# Altium PCB PTx-V2.PcbDoc (part 1 of 2)
Units mil, origin at the board's own origin, x right, y up, seen from the top; angles counter-clockwise.
Board outline 6102.36 x 4488.19 mil, 2 copper layers (Top Layer, Bottom Layer); 123 components, 103 nets, 431 pads, 228 vias.
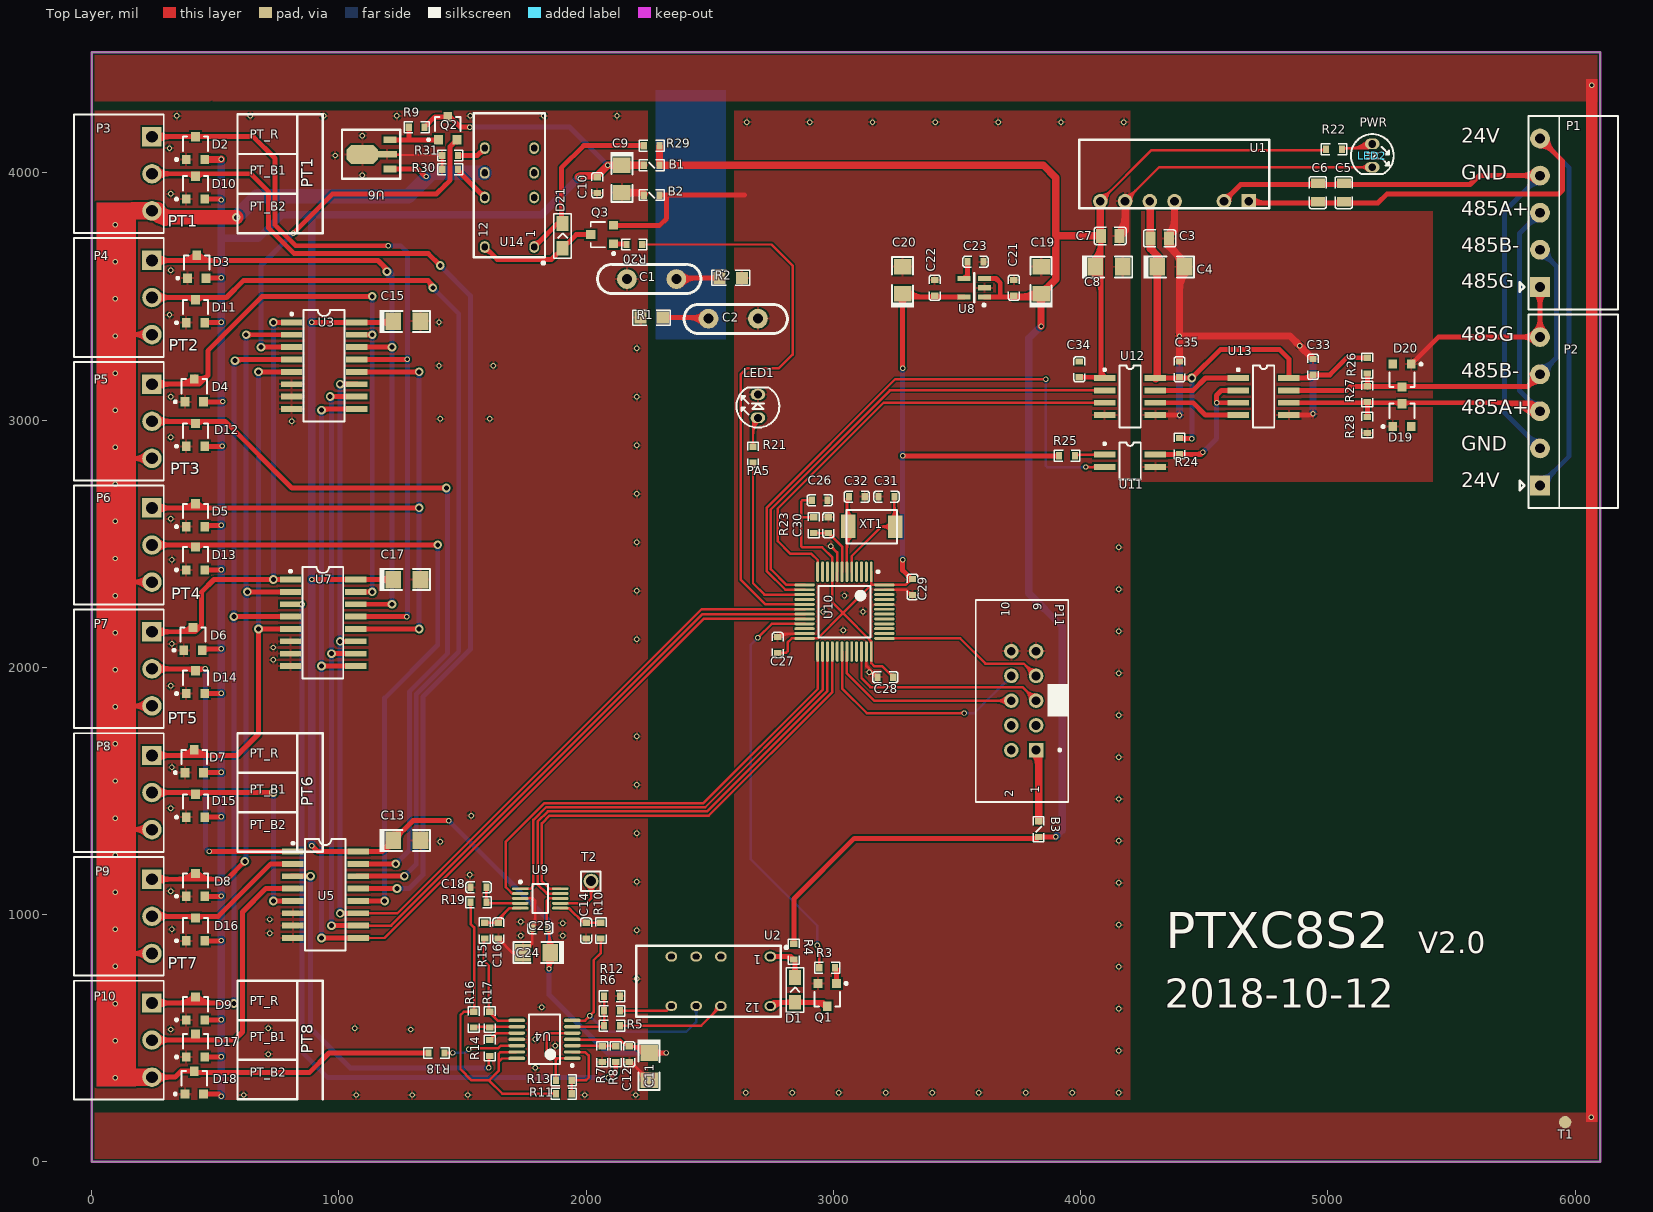
[diagram p0: Top Layer view]
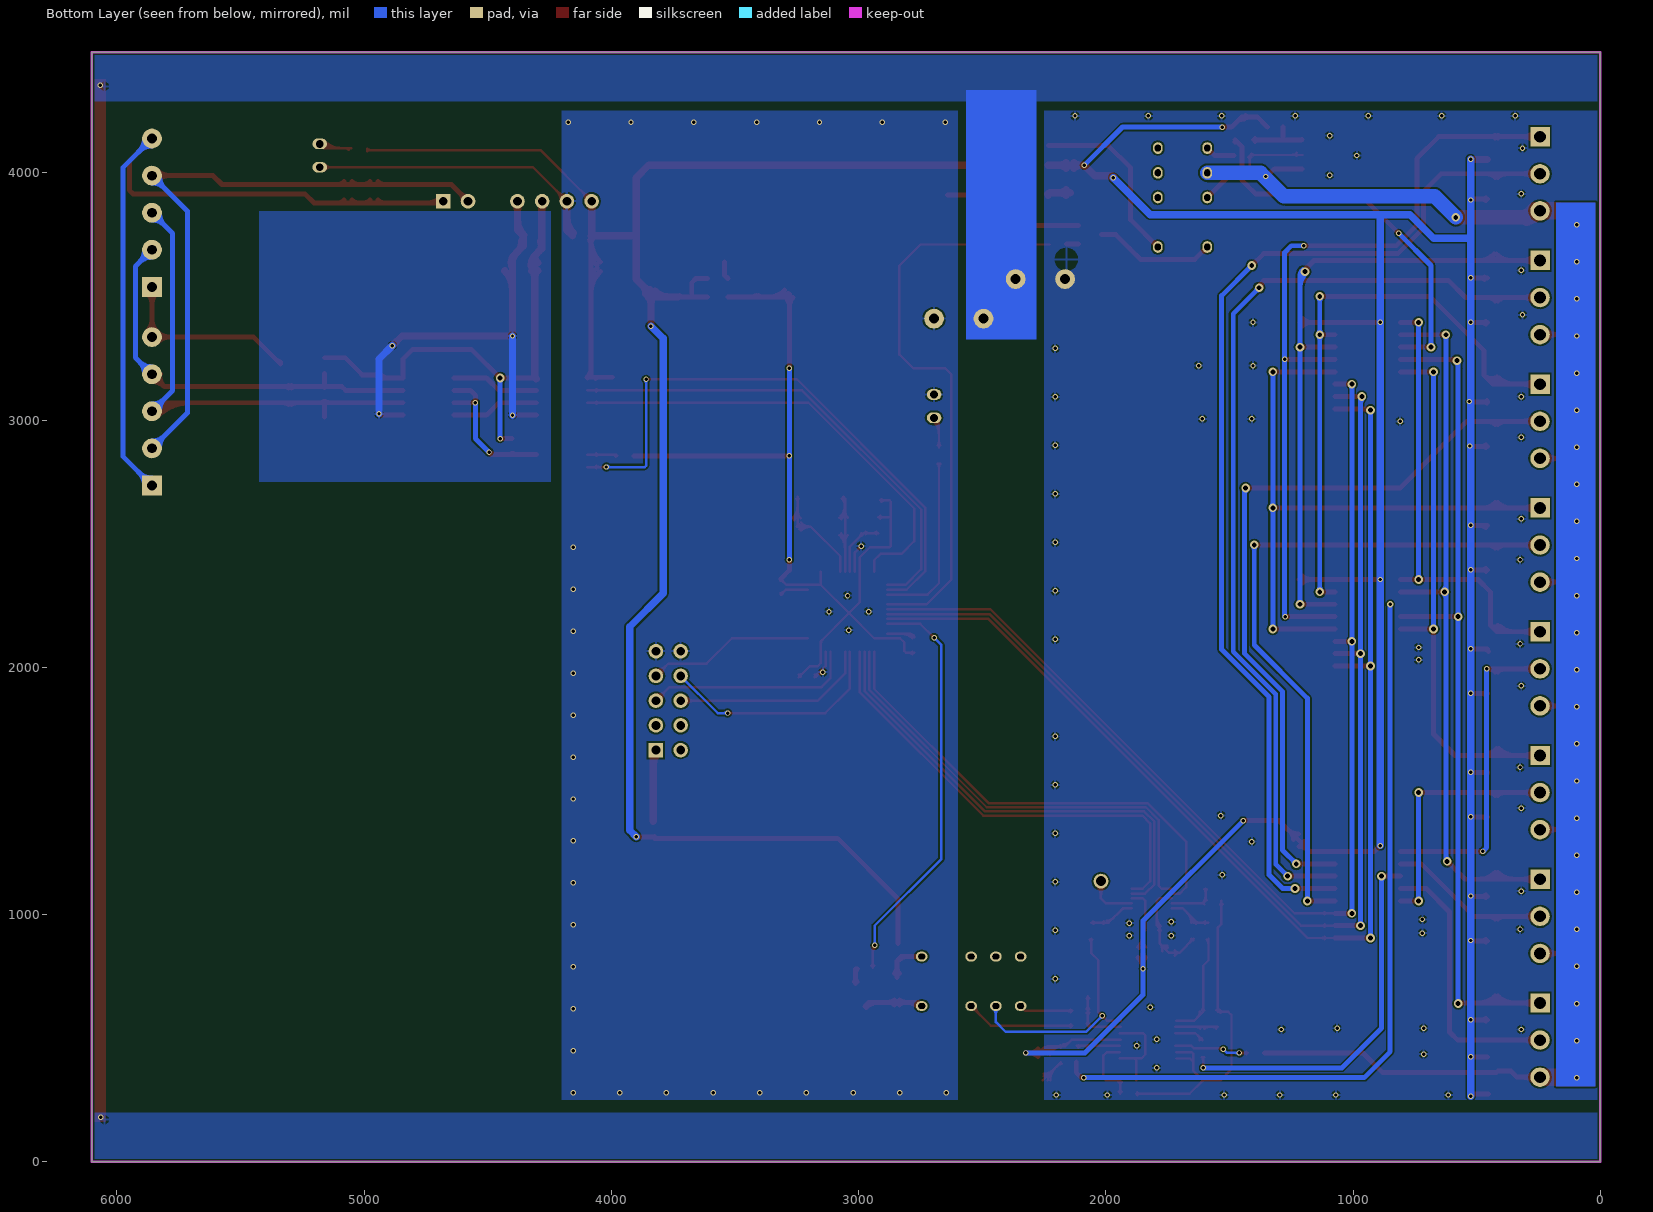
[diagram p1: Bottom Layer view, seen from below]

## Layer stack, top to bottom
Top Layer: signal copper 1.4
Dielectric: dielectric 12.6, FR-4, Dk 4.8
Bottom Layer: signal copper 1.4

## Board outline
0,0 6102.36,0 6102.36,4488.19 0,4488.19

## Design rules (kind name [scope] priority, off if disabled: settings)
Clearance [All] p1: gap=7
ComponentClearance [All] p1: gap=0 collisioncheckmode=3 verticalgap=0 showdistances=FALSE
HoleSize [All] p1: absolutevalues=TRUE maxlimit=1000 minlimit=1 maxpercent=80.000 minpercent=20.000
HoleToHoleClearance [All] p1: gap=7 allowstackedmicrovias=TRUE
MinimumSolderMaskSliver [All] p1: minsoldermaskwidth=0
PolygonConnect [All] p1: connectstyle=Relief reliefconductorwidth=10 reliefentries=4 polygonreliefangle="90 Angle"
RoomDefinition 前端 [InComponentClass('前端')] p1: confinementstyle=ConfineIn formatcopy=TRUE lockcomponents=FALSE outline -3165,-1025 -1165,-1025 -1165,-25 -3165,-25
RoomDefinition mcu [InComponentClass('mcu')] p2: confinementstyle=ConfineIn formatcopy=TRUE lockcomponents=FALSE outline -3165,-1025 -1165,-1025 -1165,-25 -3165,-25
RoutingVias [All] p1: holewidth=14 width=22 viastyle="Through Hole" minholewidth=14 minwidth=22 maxholewidth=280 maxwidth=500
SilkToSilkClearance [All] p1: silktosilkclearance=0
SilkscreenOverComponentPads [All] p1: minsilkscreentomaskgap=0
SolderMaskExpansion [All] p1: expansion=4
TestPointUsage [All] p1: valid=0 allowmultiple=FALSE
Testpoint [All] p1: side=15 testpointundercomponent=TRUE minsize=40 maxsize=100 preferedsize=60 minholesize=0 maxholesize=40 preferedholesize=32 testpointgrid=1 style=1023 order=0123456789
Width [All] p1: maxlimit=100 minlimit=7 preferedwidth=7
18 further rules are at their usual default settings.

## Classes and differential pairs
component class mcu: B3 C5 C7 C12 C19 C20 C22 C24 C25 C26 C27 C28 C30 C31 C32 C33 C34 C35 D19 D20 LED1 LED2 P11 R13 R14 R16 R18 R23 R25 R26 R28 T2 U8 U9 U10 U11 U12 U13 XT1
component class 前端: B1 B2 C1 C2 C3 C4 C5 C6 C7 C8 C9 C10 C11 C12 C13 C14 C15 C16 C17 C18 D1 D2 D3 D4 D5 D6 D7 D8 D9 D10 D11 D12 D13 D14 D15 D16 D17 D18 D21 P1 P2 P3 P4 P5 P6 P7 P8 P9 P10 Q1 Q2 Q3 R1 R2 R3 R4 R5 R6 R7 R8 R9 R10 R11 R12 R13 R14 R15 R16 R17 R18 R19 R20 R29 R30 R31 T1 U1 U2 U3 U4 U5 U6 U7 U14

## Components (designator, comment, footprint, x,y, rotation, side; value= is the part's Value field where it differs from the comment)
B1 "磁珠" 0603L 2265,4030 r180 top
B2 "磁珠" 0603L 2265,3910 r180 top
B3 "磁珠" 0603L 3830,1345 r270 top
C1 "0.1uF/1KV" RAD0.2 2265,3570 r180 top
C2 "0.1uF/1KV" RAD0.2 2595,3410 r0 top
C3 "4.7uF/16V" 0805C 4320,3735 r180 top
C4 "10uF/16V" 3216C 4310,3620 r180 top
C5 "2.2uF/50V" 0805C 5065,3920 r90 top
C6 "2.2uF/50V" 0805C 4960,3920 r90 top
C7 "4.7uF/16V" 0805C 4120,3745 r180 top
C8 "10uF/16V" 3216C 4060,3620 r180 top
C9 "10uF/16V" 3216C 2145,4030 r90 top
C10 "0.1uF" 0603C 2045,3950 r270 top
C11 "10uF/16V" 3216C 2255,440 r90 top
C12 "0.1uF" 0603C 2175,435 r90 top
C13 "10uF/16V" 3216C 1220,1300 r180 top
C14 "1uF" 0603C 2000,935 r270 top
C15 "10uF/16V" 3216C 1220,3400 r180 top
C16 "10nF" 0603C 1645,935 r270 top
C17 "10uF/16V" 3216C 1220,2355 r180 top
C18 "10nF" 0603C 1565,1110 r180 top
C19 "10uF/16V" 3216C 3840,3510 r270 top
C20 "10uF/16V" 3216C 3280,3510 r270 top
C21 "0.1uF" 0603C 3730,3535 r270 top
C22 "0.1uF" 0603C 3410,3535 r270 top
C23 "470P" 0603C 3575,3640 r0 top
C24 "10uF/16V" 3216C 1855,845 r0 top
C25 "0.1uF" 0603C 1815,945 r0 top
C26 "0.1uF" 0603C 2945,2675 r180 top
C27 "0.1uF" 0603C 2775,2090 r270 top
C28 "0.1uF" 0603C 3210,1960 r180 top
C29 "0.1uF" 0603C 3320,2325 r90 top
C30 "0.1uF" 0603C 2980,2575 r90 top
C31 "22P" 0603C 3215,2690 r180 top
C32 "22P" 0603C 3095,2690 r0 top
C33 "0.1uF" 0603C 4940,3215 r270 top
C34 "0.1uF" 0603C 3995,3205 r90 top
C35 "0.1uF" 0603C 4400,3205 r270 top
D1 "SS14" SOD123 2845,695 r90 top
D2 "PESD5V0L2BT" SOT23A 420,4100 r0 top
D3 "PESD5V0L2BT" SOT23A 425,3620 r0 top
D4 "PESD5V0L2BT" SOT23A 415,3120 r0 top
D5 "PESD5V0L2BT" SOT23A 420,2615 r0 top
D6 "PESD5V0L2BT" SOT23A 410,2115 r0 top
D7 "PESD5V0L2BT" SOT23A 415,1620 r0 top
D8 "PESD5V0L2BT" SOT23A 420,1120 r0 top
D9 "PESD5V0L2BT" SOT23A 420,620 r0 top
D10 "PESD5V0L2BT" SOT23A 420,3940 r0 top
D11 "PESD5V0L2BT" SOT23A 420,3440 r0 top
D12 "PESD5V0L2BT" SOT23A 420,2940 r0 top
D13 "PESD5V0L2BT" SOT23A 420,2440 r0 top
D14 "PESD5V0L2BT" SOT23A 420,1940 r0 top
D15 "PESD5V0L2BT" SOT23A 420,1440 r0 top
D16 "PESD5V0L2BT" SOT23A 420,940 r0 top
D17 "PESD5V0L2BT" SOT23A 420,470 r0 top
D18 "PESD5V0L2BT" SOT23A 415,320 r0 top
D19 "PESD5V0L2BT" SOT23A 5300,3020 r0 top
D20 "PESD5V0L2BT" SOT23A 5300,3180 r180 top
D21 "SS14" SOD123 1905,3745 r90 top
LED1 "LED" LED-3 2695,3055.76 r90 top
LED2 "LED" LED-3 5180,4070 r270 top
P1 "Header 5" KF2DEG-3.81-5 5858.27,3838.58 r90 top locked
P2 "Header 5" KF2DEG-3.81-5 5858.27,3035.43 r90 top locked
P3 "Header 3" KF2DEG-3.81-3 244.09,3996.06 r270 top locked
P4 "Header 3" KF2DEG-3.81-3 244.09,3495.5 r270 top locked
P5 "Header 3" KF2DEG-3.81-3 244.09,2994.94 r270 top locked
P6 "Header 3" KF2DEG-3.81-3 244.09,2494.38 r270 top locked
P7 "Header 3" KF2DEG-3.81-3 244.09,1993.81 r270 top locked
P8 "Header 3" KF2DEG-3.81-3 244.09,1493.25 r270 top locked
P9 "Header 3" KF2DEG-3.81-3 244.09,992.69 r270 top locked
P10 "Header 3" KF2DEG-3.81-3 244.09,492.13 r270 top locked
P11 "Header 5X2" DC2.54-10 3770,1865 r90 top
Q1 "S9014" SOT23A 2975,675 r180 top
Q2 "S9014" SOT23A 1440,4180 r0 top
Q3 "S9014" SOT23A 2065,3750 r90 top
R1 "1M" 0805R 2265,3415 r180 top
R2 "1M" 0805R 2585,3575 r0 top
R3 "10K" 0603R 2975,785 r0 top
R4 "50R" 0603R 2840,850 r90 top
R5 "30K" 0603R 2105,550 r0 top
R6 "1K" 0603R 2105,610 r0 top
R7 "10K" 0603R 2065,435 r90 top
R8 "10K" 0603R 2120,435 r270 top
R9 "1K" 0603R 1315,4185 r0 top
R10 "10K" 0603R 2060,935 r90 top
R11 "10K" 0603R 1910,275 r180 top
R12 "1K" 0603R 2105,670 r0 top
R13 "10K" 0603R 1910,330 r0 top
R14 "1K" 0603R 1610,460 r270 top
R15 "10K" 0603R 1590,935 r90 top
R16 "1K" 0603R 1545,575 r90 top
R17 "47K" 0603R 1610,575 r90 top
R18 "10K" 0603R 1395,440 r180 top
R19 "10K" 0603R 1565,1050 r0 top
R20 "10K" 0603R 2195,3710 r180 top
R21 "1K" 0603R 2675,2860 r90 top
R22 "10K" 0603R 5025,4095 r0 top
R23 "10K" 0603R 2920,2575 r270 top
R24 "1K" 0603R 4400,2895 r90 top
R25 "100R" 0603R 3945,2855 r180 top
R26 "10K" 0603R 5160,3220 r90 top
R27 "120R" 0603R 5160,3105 r90 top
R28 "10K" 0603R 5160,2980 r90 top
R29 "50R" 0603R 2265,4110 r0 top
R30 "2.5K" 0603R 1450,4015 r0 top
R31 "2.7K" 0603R 1450,4070 r0 top
T1 "TP" TP1 5960,160 r0 top
T2 "TP" TESTP 2020,1135 r0 top
U1 "D240505S" D240505S-2W 4680,3885 r180 top
U2 "JDQ(G6S-2)" JDQ-G6S-2 2495,730 r180 top
U3 "CD4051" SOP16 940,3220 r270 top
U4 "OPA4330AIPWR" TSSOP14-65 1832,495 r180 top locked
U5 "CD4051" SOP16 945,1080 r270 top
U6 "TL431B" SOT-89 1155,4075 r90 top
U7 "CD4051" SOP16 935,2180 r270 top
U8 "MIC5219-3.3" SOT23-5 3570,3535 r180 top
U9 "ADS1118" TSSOP10 1815,1065 r0 top
U10 "STM32F103C8T6" LQFP48 3045,2225 r270 top
U11 "TLP281" SOP4 4200,2835 r270 top
U12 "ADUM3201" SOP8 4200,3095 r270 top
U13 "BL3085B" SOP8 4740,3095 r270 top
U14 "JDQ(G6S-2)" JDQ-G6S-2 1690,3950 r90 top
XT1 "8M" 5032 3155,2570 r180 top

## Footprints (in the part's own frame and the unit in brackets; to place one, negate y for a bottom-side part, rotate by r counter-clockwise, add the part's x,y. Pads: shape width x height; smd on the part's side, far side on the other; paste and mask are expansions set on the pad)
0603C [mil]
  rect 25x30 smd: 1(-32,0) 2(32,0)
  silkscreen extent -51,-22 51,22
0603L [mil]
  rect 25x30 smd: 1(-32,0) 2(32,0)
  silkscreen extent -51,-22 51,22
0603R [mil]
  rect 25x30 smd: 1(-32,0) 2(32,0)
  silkscreen extent -51,-22 51,22
0805C [mm]
  rect 1x1.45 smd: 1(-0.95,0) 2(0.95,0)
  silkscreen extent -1.64,-0.86 1.64,0.89
0805R [mm]
  rect 1.25x1.25 smd: 1(-1.143,0) 2(1.143,0)
  silkscreen extent -1.93,-0.76 1.93,0.79
3216C [mm] "A型"
  rect 1.6x1.8 smd: 1(0,0) 2(-2.8,0)
  silkscreen extent -3.78,-1.17 1.4,1.19
5032 [mm]
  rect 1.5x2.3 smd: 1(-2.438,0.025)
  rect 1.5x2.4 smd: 2(2.388,0)
  silkscreen extent -2.59,-1.7 2.59,1.75
D240505S-2W [mm] "24V转5Vdcdc模块"
  rect 1.5x1.5 hole 0.9: 1(0,0)
  round 1.5 hole 0.9: 2(2.54,0) 4(7.62,0) 5(10.16,0) 6(12.7,0) 7(15.24,0)
  silkscreen extent -2.09,-6.3 17.41,0.7
DC2.54-10 [mm] "Connector; IDC, PCB Transition - 2 Rows, Thru-Hole; 10 Position; Vertical; Pitch 2.54 mm; Body 18.00 x 6.1 x 7.45 mm (LxWxH)"
  rect 1.5x1.5 hole 0.9: 1(-5.08,-1.27)
  round 1.5 hole 0.9: 2(-5.08,1.27) 3(-2.54,-1.27) 4(-2.54,1.27) 5(0,-1.27) 6(0,1.27) 7(2.54,-1.27) 8(2.54,1.27) 9(5.08,-1.27) 10(5.08,1.27)
  silkscreen extent -10.39,-4.57 10.36,4.93
JDQ-G6S-2 [mm] "继电器（G6S-2） 5VDC"
  oval 1.2x1 hole 0.6 slot 0.7 at 0 deg: 1(-6.35,-2.54) 3(-1.27,-2.54) 4(1.27,-2.54) 5(3.81,-2.54) 8(3.81,2.54) 9(1.27,2.54) 10(-1.27,2.54) 12(-6.35,2.54)
  silkscreen extent -8.14,-3.65 7.4,3.65
KF2DEG-3.81-3 [mm]
  rect 2x2 hole 1.2: 1(-3.81,0)
  round 2 hole 1.2: 2(0,0) 3(3.81,0)
  silkscreen extent -6.1,-8 6.1,1.2
KF2DEG-3.81-5 [mil]
  rect 80x80 hole 39.37: 1(-300,0)
  round 80 hole 39.37: 2(-150,0) 3(0,0) 4(150,0) 5(300,0)
  silkscreen extent -391,-315 391,83
LED-3 [mm]
  oval 1.1x1.5 hole 0.8: A(-1.194,0) K(1.206,0)
  silkscreen extent -2.19,-2.2 1.92,2.2
LQFP48 [mm]
  oval 2.1x0.3 smd: 1(-4.1,2.75) 2(-4.1,2.25) 3(-4.1,1.75) 4(-4.1,1.25) 5(-4.1,0.75) 6(-4.1,0.25) 7(-4.1,-0.25) 8(-4.1,-0.75) 9(-4.1,-1.25) 10(-4.1,-1.75) 11(-4.1,-2.25) 12(-4.1,-2.75) 25(4.1,-2.75) 26(4.1,-2.25) 27(4.1,-1.75) 28(4.1,-1.25) 29(4.1,-0.75) 30(4.1,-0.25) 31(4.1,0.25) 32(4.1,0.75) 33(4.1,1.25) 34(4.1,1.75) 35(4.1,2.25) 36(4.1,2.75)
  oval 0.3x2.1 smd: 13(-2.75,-4.1) 14(-2.25,-4.1) 15(-1.75,-4.1) 16(-1.25,-4.1) 17(-0.75,-4.1) 18(-0.25,-4.1) 19(0.25,-4.1) 20(0.75,-4.1) 21(1.25,-4.1) 22(1.75,-4.1) 23(2.25,-4.1) 24(2.75,-4.1) 37(2.75,4.1) 38(2.25,4.1) 39(1.75,4.1) 40(1.25,4.1) 41(0.75,4.1) 42(0.25,4.1) 43(-0.25,4.1) 44(-0.75,4.1) 45(-1.25,4.1) 46(-1.75,4.1) 47(-2.25,4.1) 48(-2.75,4.1)
  silkscreen extent -4.22,-2.65 2.65,3.57
RAD0.2 [mil]
  round 80 hole 40: 1(-100,0) 2(100,0)
  silkscreen extent -199,-60 219,58
SOD123 [mil]
  rect 60x49.21 smd: A(-50,0) K(50,0)
  silkscreen extent -90,-35 90,35
SOP4 [mm] "Small Outline; 6 Leads; Body Width 4.3 mm; Pitch 1.27 mm"
  rect 0.6x2.2 smd: 1(-0.635,-2.6) 2(0.635,-2.6) 3(0.635,2.6) 4(-0.635,2.6)
  silkscreen extent -1.91,-2.72 1.91,1.1
SOP8 [mm] "Small Outline; 8 Leads; Body Width 4.3 mm; Pitch 1.27 mm"
  rect 0.6x2.2 smd: 1(-1.905,-2.6) 2(-0.635,-2.6) 3(0.635,-2.6) 4(1.905,-2.6) 5(1.905,2.6) 6(0.635,2.6) 7(-0.635,2.6) 8(-1.905,2.6)
  silkscreen extent -3.18,-2.72 3.18,1.1
SOP16 [mm] "Small Outline; 16 Leads; Body Width 5.6 mm; Pitch 1.27 mm"
  rect 0.6x2.2 smd: 1(-4.445,-3.321) 2(-3.175,-3.321) 3(-1.905,-3.321) 4(-0.635,-3.321) 5(0.635,-3.321) 6(1.905,-3.321) 7(3.175,-3.321) 8(4.445,-3.321) 9(4.445,3.371) 10(3.175,3.371) 11(1.905,3.371) 12(0.635,3.371) 13(-0.635,3.371) 14(-1.905,3.371) 15(-3.175,3.371) 16(-4.445,3.371)
  silkscreen extent -5.73,-3.45 5.73,2.1
SOT23-5 [mm] "SOT23, 5-Leads, Body 3.0x2.6mm (max), Pitch 0.95mm, IPC Medium Density"
  rect 1.3x0.55 smd: 1(-1.051,0.95) 2(-1.051,0) 3(-1.051,-0.95) 4(1.051,-0.95) 5(1.051,0.95)
  silkscreen extent -1.13,-1.5 0.05,1.9
SOT23A [mm] "SOT-23; 3 Leads; Body 3.0 x 2.5 mm, inc. leads (LxW max)"
  rect 0.9x0.95 smd: 1(-0.95,-1.175) 2(0.95,-1.175) 3(0,1.175)
  silkscreen extent -2.07,-1.3 1.3,1.18
SOT-89 [mm] "SOT23, 5-Leads, Body 3.0x2.6mm (max), Pitch 0.95mm, IPC Medium Density"
  rect 0.7x1.35 smd: 1(-1.501,-1.321) 3(1.499,-1.321)
  oct 1.98x3.25 smd: 2(-0.025,1.524)
  rect 0.7x1.99 smd: 2(-0.001,-1.026)
  silkscreen extent -2.5,-2.39 2.5,3.61
TESTP [mil]
  round 60 hole 40: 1(0,0)
  silkscreen extent -40,-39 39,39
TP1 [mil]
  round 50 smd: 1(0,0)
TSSOP10 [mm] "TSSOP, 10-Leads, Body 3.0x3.0mm (max), Pitch 0.50mm, IPC Medium Density"
  oval 1.7x0.3 smd: 1(-2.05,1) 2(-2.05,0.5) 3(-2.05,0) 4(-2.05,-0.5) 5(-2.05,-1) 6(2.05,-1) 7(2.05,-0.5) 8(2.05,0) 9(2.05,0.5) 10(2.05,1)
  silkscreen extent -2.17,-1.5 0.8,1.82
TSSOP14-65 [mm] "TSOP, 14-Leads, Body 5.1x4.5mm (max), Pitch 0.65mm, IPC Medium Density"
  oval 1.7x0.35 smd: 1(-2.85,1.95) 2(-2.85,1.3) 3(-2.85,0.65) 4(-2.85,0) 5(-2.85,-0.65) 6(-2.85,-1.3) 7(-2.85,-1.95) 8(2.85,-1.95) 9(2.85,-1.3) 10(2.85,-0.65) 11(2.85,0) 12(2.85,0.65) 13(2.85,1.3) 14(2.85,1.95)
  silkscreen extent -2.98,-2.55 1.6,2.8

## Part data
B1 B2 B3: library part BEAD
C1 C2 C3 C5 C6 C7 C10 C12 C14 C16 C18 C21 C22 C23 C25 C26 C27 C28 C29 C30 C31 C32 C33 C34 C35: library part CAP, "普通小电容"
C4 C8 C9 C11 C13 C15 C17 C19 C20 C24: library part CAP-T, "钽电容"
D1 D21: library part D-S, "肖特基二极管"
D2 D3 D4 D5 D6 D7 D8 D9 D10 D11 D12 D13 D14 D15 D16 D17 D18 D19 D20: "schottky diod"
P1 P2: "Header, 5-Pin"
P3 P4 P5 P6 P7 P8 P9 P10: "Header, 3-Pin"
P11: "Header, 5-Pin, Dual row"
Q1 Q2 Q3: library part NPN, "NPN三极管"
R1 R2 R3 R4 R5 R6 R7 R8 R9 R10 R11 R12 R13 R14 R15 R16 R17 R18 R19 R20 R21 R22 R23 R24 R25 R26 R27 R28 R29 R30 R31: library part RES, "普通电阻"
T1 T2: "testpoint"
U1: library part D240505S-2W, "24V转双5V隔离DCDC"
U2 U14: "继电器（G6S-2 5VDC）"
U3 U5 U7: "模拟多路复用器"
U4: library part OPA4330, "输出轨到轨，4运放"
U6: library part TL431, "TL431"
U8: library part MIC5219
U9: "16λ ADC"
U10: library part STM32F103
U11: "TLP281 光耦"
U13: "BL3085B 15KV防静电485"
XT1: library part XT, "晶振"

## Via types
v1: diameter 22, hole 14, Top Layer to Bottom Layer, 185 vias
v2: diameter 35, hole 20, Top Layer to Bottom Layer, 42 vias
v3: diameter 25, hole 15, Top Layer to Bottom Layer, 1 vias

## Nets (pads, with @x,y where several pads share a name; then routed paths per layer and width w, separated by ;. In a path a pad name is that pad's centre, name@x,y a point inside that pad or via, vN(x,y) a via of type N, cw(c..) or ccw(c..) an arc to the next point about the centre after c; other vN are vias at no path point)
1GND: C34.2
2D5V: C3.2 C4.1 C33.2 C35.2 R24.2 R26.2 U1.5 U12.8 U13.8 | length 2461.2
  Top Layer w20: U12.8@4302.36,3170 v2(4450,3170) 4565,3285 4805,3285 4842.36,3247.64 U13.8@4842.36,3170 4927,3170 C33.2@4940,3183 5008,3183 5077,3252 R26.2@5160,3252 ; 4384.22,3170 ccw(c4384.22,3186.28) C35.2@4395.73,3174.77 ; R24.2@4402,2925 v1(4450,2925) ; C35.2@4404.27,3174.77 ccw(c4415.78,3186.28) 4415.78,3170 ; v2@4444.7,3164.7 ccw(c4431.89,3151.89) 4431.89,3170 ccw(c4431.89,3188.11) v2@4444.7,3175.3 ; v2@4450,3177.5 ccw(c4450,3195.61) 4462.8,3182.8 ccw(c4475.61,3170) v2@4457.5,3170 ; 4900.08,3170 ccw(c4900.08,3220.42) C33.2@4935.73,3184.77
  Top Layer w30: U1.5@4269.73,3874.73 cw(c4238.65,3843.65) 4282.6,3843.65 ; U1.5@4282.6,3882.4 4282.6,3745 4282.6,3692.4 4310,3665 U12.8@4310,3177.64 ; C3.2@4286.74,3723.96 ccw(c4318.51,3707.25) 4293.13,3681.87 ; C4.1@4298.34,3604.4 cw(c4270.18,3576.24) 4310,3576.24 cw(c4349.82,3576.24) C4.1@4321.66,3604.4 ; C4.1@4298.34,3635.6 ccw(c4270.18,3663.76) 4310,3663.76 ccw(c4349.82,3663.76) C4.1@4321.66,3635.6 ; U12.8@4304.62,3167.75 ccw(c4291.62,3180.74) U12.8@4310,3180.74 ; 4307.18,3667.82 cw(c4267.31,3627.95) C4.1@4323.44,3622.67
  Bottom Layer w20: v2@4444.7,3164.7 cw(c4431.89,3151.89) 4450,3151.89 cw(c4468.11,3151.89) v2@4455.3,3164.7 ; v1(4450,2925) v2(4450,3170)
2GND: C3.1 C4.2 C33.1 C35.1 D19.1 D20.1 P1.1 P2.5 R28.1 U1.4 U11.3 U12.5 U13.5 | length 3580.6
  Top Layer w20: U12.5@4302.36,3020 v1(4400,3020) ; U13.5@4842.36,3020 4935,3020 v1(4940,3025) ; 4925.51,3020 ccw(c4925.51,3039.49) v1@4939.29,3025.71 ; D20.1@5337.4,3226.26 5446.57,3335.43 P2.5@5858.27,3335.43 P1.1@5858.27,3538.58 ; D20.1@5337.4,3234.96 ccw(c5337.4,3255.97) D20.1@5352.25,3241.11 ; P2.5@5837.05,3314.22 ccw(c5785.84,3263.01) 5785.84,3335.43 ccw(c5785.84,3407.86) 5837.05,3356.65 ccw(c5785.84,3407.86) 5858.27,3407.86 ccw(c5930.69,3407.86) P2.5@5879.48,3356.65 ; P1.1@5837.05,3517.37 cw(c5785.84,3466.16) 5858.27,3466.16 cw(c5930.69,3466.16) P1.1@5879.48,3517.37
  Top Layer w30: C3.1@4354.09,3747.17 ccw(c4291.53,3809.73) 4380,3809.73 ; C3.1@4362.09,3726.14 ccw(c4430.24,3726.14) 4382.05,3677.95 ; U1.4@4369.73,3874.73 cw(c4344.93,3849.93) 4380,3849.93 cw(c4415.07,3849.93) U1.4@4390.27,3874.73 ; U1.4@4380,3885 4380,3767.6 4357.4,3745 4357.4,3702.6 4400,3660 v1(4400,3340) ; 4380.88,3679.12 cw(c4325.71,3623.94) C4.2@4403.74,3623.94 ; 4392.09,3667.91 cw(c4360.75,3636.58) C4.2@4404.1,3627.37 ; C35.1@4400,3237 v1(4400,3340) ; 4400,3527.38 cw(c4508.92,3527.38) C4.2@4431.9,3604.4 ; C33.1@4940,3247 v1(4886,3301) 4847,3340 v1(4400,3340)
  Bottom Layer w30: v1(4400,3020) v1(4400,3340) ; v1(4886,3301) 4940,3247 v1(4940,3025)
485A: D19.3 P1.3 P2.3 R27.1 R28.2 U13.6 | length 2590.5
  Top Layer w20: U13.6@4842.36,3070 5455,3070 5823.7,3070 P2.3@5858.27,3035.43 ; 5144.22,3070 ccw(c5144.22,3086.28) R27.1@5155.73,3074.77 ; R28.2@5160,3012 R27.1@5160,3068 ; R27.1@5164.27,3074.77 ccw(c5175.78,3086.28) 5175.78,3070 ; 5274.72,3070 cw(c5274.72,3041.96) D19.3@5294.54,3061.79 ; D19.3@5305.46,3061.79 cw(c5325.28,3041.96) 5325.28,3070 ; 5702.39,3070 cw(c5702.39,2879.55) P2.3@5837.05,3014.22 ; 5750.67,3070 cw(c5750.67,2927.84) P2.3@5851.2,3028.36 ; 5798.96,3070 cw(c5798.96,2976.12) P2.3@5865.34,3042.5
  Bottom Layer w20: P2.3@5828.27,3035.43 ccw(c5755.84,3035.43) 5807.05,3086.65 ccw(c5858.27,3137.86) P2.3@5858.27,3065.43 ; P1.3@5828.27,3838.58 cw(c5755.84,3838.58) 5807.05,3787.37 cw(c5858.27,3736.16) P1.3@5858.27,3808.58 ; P2.3@5858.27,3035.43 5775,3118.7 5775,3755.31 P1.3@5858.27,3838.58
485B: D20.3 P1.2 P2.4 R26.1 R27.2 U13.7 | length 2088.3
  Top Layer w20: U13.7@4842.36,3120 5075,3120 5090,3135 R27.2@5160,3135 ; R27.2@5160,3132 R27.2@5160,3135 ; R26.1@5160,3188 R27.2@5160,3135 ; 5280.7,3135 cw(c5280.7,3115.43) D20.3@5294.54,3129.27 ; 5282.04,3135 ccw(c5282.04,3152.69) D20.3@5294.54,3140.18 ; D20.3@5305.46,3129.27 cw(c5319.29,3115.43) 5319.29,3135 ; D20.3@5305.46,3140.18 ccw(c5317.96,3152.69) 5317.96,3135 ; P2.4@5824.57,3185.43 P2.4@5858.27,3185.43 5807.83,3135 ; P2.4@5828.27,3185.1 cw(c5758.5,3184.34) 5807.84,3135 ; P2.4@5857.94,3155.43 ccw(c5857.18,3085.66) 5807.84,3135 ; R27.2@5160,3135 5363,3135 5807.83,3135
  Bottom Layer w20: P2.4@5858.27,3185.43 5925,3252.17 5925,3621.85 P1.2@5858.27,3688.58 ; P2.4@5858.27,3215.43 ccw(c5858.27,3287.86) 5909.48,3236.65 ccw(c5960.69,3185.43) P2.4@5888.27,3185.43 ; P1.2@5858.27,3658.58 cw(c5858.27,3586.16) 5909.48,3637.37 cw(c5960.69,3688.58) P1.2@5888.27,3688.58
A5V: B1.2 C9.1 C10.1 C11.1 C12.2 C13.1 C15.1 C17.1 C24.1 C25.2 D2.2 D3.2 D4.2 D5.2 D6.2 D7.2 D8.2 D9.2 D10.2 D11.2 D12.2 D13.2 D14.2 D15.2 D16.2 D17.2 D18.2 Q2.3 R9.2 U3.16 U4.4 U5.16 U7.16 U9.8 | length 15250.8
  Top Layer w10: C24.1@1836.26,867.67 ccw(c1803.1,900.83) 1850,900.83 ccw(c1906.9,900.83) C24.1@1866.66,860.6 ; C25.2@1840,945 1840,1055 1850,1065 U9.8@1895.71,1065 ; C25.2@1840,958.36 ccw(c1857.86,958.36) C25.2@1845.23,945.73 ; 1840,982.51 ccw(c1882.01,982.51) C25.2@1852.3,952.8 ; C25.2@1841.7,937.2 cw(c1821.65,917.15) 1850,917.15 ; C24.1@1850,845 C25.2@1850,942 ; 1850,924.98 ccw(c1931.04,924.98) C24.1@1873.74,867.67 ; U4.4@1939.2,494.41 2137.06,494.41 2164.47,467 C12.2@2175,467 ; 2145.99,485.48 ccw(c2172.5,511.99) C12.2@2172.5,474.5 ; C12.2@2182.8,461.7 cw(c2195.61,448.89) 2195.61,467 cw(c2195.61,485.11) C12.2@2182.8,472.3 ; C12.2@2189.22,467 cw(c2189.22,417.78) C11.1@2235.54,434.42 ; 2203.44,467 cw(c2203.44,422.89) C11.1@2244.95,437.8 ; 2217.66,467 cw(c2217.66,428) C11.1@2254.36,441.18 ; C11.1@2226.13,431.04 ccw(c2175,412.68) C12.2@2175,467 ; C11.1@2228,467 C12.2@2175,467 ; C11.1@2231.87,467 cw(c2231.87,433.11) C11.1@2263.77,444.57
  Top Layer w20: D18.2@452.4,273.74 516.26,273.74 v1(525,265) ; D6.2@452.86,2064.27 cw(c475.73,2041.4) 475.73,2073.74 ; D17.2@457.4,423.74 523.74,423.74 v1(525,425) ; D9.2@457.4,573.74 523.74,573.74 v1(525,575) ; D8.2@457.4,1073.74 523.74,1073.74 v1(525,1075) ; D15.2@457.4,1393.74 523.74,1393.74 v1(525,1395) ; D7.2@457.4,1573.74 523.74,1573.74 v1(525,1575) ; D14.2@457.4,1893.74 526.26,1893.74 v1(525,1895) ; D6.2@457.4,2073.74 523.74,2073.74 v1(525,2075) ; D13.2@457.4,2393.74 523.74,2393.74 v1(525,2395) ; D5.2@457.4,2573.74 523.74,2573.74 v1(525,2575) ; D12.2@457.4,2893.74 528.74,2893.74 v1(527.48,2895) ; D4.2@457.4,3073.74 528.74,3073.74 v1(530,3075) ; D11.2@457.4,3393.74 523.74,3393.74 v1(525,3395) ; D3.2@457.4,3573.74 D3.2@462.4,3573.74 523.74,3573.74 v1(525,3575) ; D10.2@457.4,3893.74 521.26,3893.74 v1(525,3890) ; D7.2@457.86,1568.28 cw(c471.03,1555.11) 471.03,1573.74 cw(c471.03,1592.37) D7.2@457.86,1579.2 ; D4.2@457.86,3068.28 cw(c471.03,3055.11) 471.03,3073.74 cw(c471.03,3092.37) D4.2@457.86,3079.2 ; D16.2@461.14,890 D16.2@457.4,893.74 523.74,893.74 v1(525,895) ; D9.2@462.86,568.28 cw(c476.03,555.11) 476.03,573.74 cw(c476.03,592.37) D9.2@462.86,579.2 ; D16.2@462.86,888.28 cw(c476.03,875.11) 476.03,893.74 cw(c476.03,912.37) D16.2@462.86,899.2 ; D8.2@462.86,1068.28 cw(c476.03,1055.11) 476.03,1073.74 cw(c476.03,1092.37) D8.2@462.86,1079.2 ; D15.2@462.86,1388.28 cw(c476.03,1375.11) 476.03,1393.74 cw(c476.03,1412.37) D15.2@462.86,1399.2 ; D14.2@462.86,1888.28 cw(c476.03,1875.11) 476.03,1893.74 cw(c476.03,1912.37) D14.2@462.86,1899.2 ; D13.2@462.86,2388.28 cw(c476.03,2375.11) 476.03,2393.74 cw(c476.03,2412.37) D13.2@462.86,2399.2 ; D5.2@462.86,2564.27 cw(c485.73,2541.4) 485.73,2573.74 ; D12.2@462.86,2888.28 cw(c476.03,2875.11) 476.03,2893.74 cw(c476.03,2912.37) D12.2@462.86,2899.2 ; D11.2@462.86,3388.28 cw(c476.03,3375.11) 476.03,3393.74 cw(c476.03,3412.37) D11.2@462.86,3399.2 ; D10.2@462.86,3888.28 cw(c476.03,3875.11) 476.03,3893.74 cw(c476.03,3912.37) D10.2@462.86,3899.2 ; D3.2@467.86,3568.28 cw(c481.03,3555.11) 481.03,3573.74 cw(c481.03,3592.37) D3.2@467.86,3579.2 ; 513.56,3893.74 cw(c513.56,3878.56) v1@524.29,3889.29 ; v1(890,1279) 914,1255 1072.73,1255 1175,1255 C13.1@1220,1300 1300,1380 v1(1445,1380) ; v1(890,2355) C17.1@1220,2355 ; v1(890,3395) U3.16@1072.73,3395 C15.1@1215,3395 ; 1165.54,3395 ccw(c1165.54,3450.53) C15.1@1204.8,3411.26 ; 1170.67,3395 cw(c1170.67,3346.73) C15.1@1204.8,3380.86 ; 1176.58,1256.58 cw(c1220,1213.17) C13.1@1220,1274.57 ; 1186.09,1266.09 ccw(c1156.11,1296.06) C13.1@1198.5,1296.06 ; C17.1@1204.8,2339.8 ccw(c1168.1,2303.1) 1168.1,2355 ccw(c1168.1,2406.9) C17.1@1204.8,2370.2 ; C13.1@1220,1325.43 ccw(c1220,1386.83) 1263.42,1343.42 ; C13.1@1241.5,1303.94 cw(c1283.89,1303.94) 1253.91,1333.91 ; R9.2@1347,4185 1388.26,4226.26 Q2.3@1440,4226.26 1450,4226.26 1491.26,4185 v1(1530,4185) ; Q2.3@1434.54,4220.8 ccw(c1421.37,4207.63) 1421.37,4226.26 ccw(c1421.37,4244.89) Q2.3@1434.54,4231.72 ; Q2.3@1440,4217.56 cw(c1440,4172.41) 1471.92,4204.34 ; C24.1@1839.8,825.86 cw(c1815.18,801.24) 1850,801.24 ; v1@1850,779.8 cw(c1912.58,779.8) C24.1@1869.72,825.4 ; v1(1850,780) C24.1@1850,840 ; C9.1@2135,4030 C9.1@2145,4030 ; C11.1@2255,440 v1(2325,440) ; C11.1@2274.14,424.8 cw(c2310.83,388.1) 2310.83,440 cw(c2310.83,491.9) C11.1@2274.14,455.2
  Top Layer w30: D2.2@457.4,4053.74 523.74,4053.74 v1(525,4055) ; v1@1967.17,3982.83 cw(c1978.21,3971.79) 1978.21,3987.4 ; v1(1970,3980) 1972.6,3977.4 1982.6,3987.4 2045,3987.4 v1(2087.6,4030) C9.1@2135,4030 ; C9.1@2129.4,4018.34 ccw(c2101.24,3990.18) 2101.24,4030 ccw(c2101.24,4069.82) C9.1@2129.4,4041.66 ; C9.1@2145,4030 B1.2@2233,4030 ; C9.1@2160.6,4018.34 cw(c2188.76,3990.18) 2188.76,4030 cw(c2188.76,4069.82) C9.1@2160.6,4041.66
  Bottom Layer w20: v1(1445,1380) 1850,975 v1(1850,780) 1850,675 2085,440 v1(2325,440) ; v1(1530,4185) 1932.6,4185 v1(2087.6,4030)
  Bottom Layer w30: v1(525,265) v1(525,425) v1(525,575) v1(525,895) v1(525,1075) v1(525,1395) v1(525,1575) v1(525,1895) v1(525,2075) v1(525,2395) v1(525,2575) 525,3075 v1(525,3395) v1(525,3575) 525,3735 ; v1(525,4055) v1(525,3890) 525,3735 ; v1@890.5,1279.5 890.5,3825.5 ; v1(1970,3980) 1820,3830 770,3830 675,3735 525,3735
ADC1: C16.1 R15.2 U9.5 | length 298.7
  Top Layer w10: R15.2@1585,967 1632,967 1690.63,1025.63 U9.5@1734.29,1025.63 ; R15.2@1597.8,961.7 cw(c1610.61,948.89) 1610.61,967 cw(c1610.61,985.11) R15.2@1597.8,972.3 ; C16.1@1637.2,961.7 ccw(c1624.39,948.89) 1624.39,967 ccw(c1624.39,985.11) C16.1@1637.2,972.3 ; C16.1@1645,967 cw(c1676.38,967) 1654.19,989.19 ; C16.1@1655,967 cw(c1710.53,967) 1671.26,1006.26
ADC2: C14.1 R10.2 U9.6 | length 303.1
  Top Layer w10: U9.6@1895.71,1025.63 1896.34,1025 1931.02,1025 1989.02,967 C14.1@2000,967 R10.2@2060,967 ; U9.6@1923.27,1024.72 cw(c1923.27,1005.35) 1936.97,1019.05 ; U9.6@1923.45,1024.74 cw(c1925.97,1012.83) 1934.58,1021.44 ; 1970.22,985.8 ccw(c1997.5,1013.08) C14.1@1997.5,974.5 ; C14.1@2007.8,961.7 cw(c2020.61,948.89) 2020.61,967 cw(c2020.61,985.11) C14.1@2007.8,972.3 ; R10.2@2052.2,961.7 ccw(c2039.39,948.89) 2039.39,967 ccw(c2039.39,985.11) R10.2@2052.2,972.3
AGND: B2.2 C1.2 C9.2 C10.2 C11.2 C12.1 C13.2 C14.2 C15.2 C16.2 C17.2 C18.2 C24.2 C25.1 D2.1 D3.1 D4.1 D5.1 D6.1 D7.1 D8.1 D9.1 D10.1 D11.1 D12.1 D13.1 D14.1 D15.1 D16.1 D17.1 D18.1 R1.2 R7.1 R12.2 R30.1 R31.1 U3.6 U3.7 U3.8 U4.11 U5.6 U5.7 U5.8 U6.2 U7.6 U7.7 U7.8 U9.3 | length 1532.4
  Top Layer w10: U6.2@1203.34,4072 R31.1@1416,4072 ; U6.2@1227,4068.74 cw(c1234.87,4060.86) 1234.87,4072 ; U6.2@1227,4081.15 ccw(c1249.09,4103.25) 1249.09,4072 ; 1398.69,4072 ccw(c1398.69,4091.81) R31.1@1412.7,4077.8 ; 1401.1,4072 cw(c1401.1,4055.6) R31.1@1412.7,4067.2 ; R30.1@1412.7,4022.8 ccw(c1399.89,4035.61) 1418,4035.61 ccw(c1436.11,4035.61) R30.1@1423.3,4022.8 ; R31.1@1412.7,4062.2 cw(c1399.89,4049.39) 1418,4049.39 cw(c1436.11,4049.39) R31.1@1423.3,4062.2 ; R30.1@1418,4015 R31.1@1418,4070 ; C16.2@1645,903 1703,845 ; C16.2@1647.5,895.5 cw(c1647.5,883.43) C16.2@1656.04,891.96 ; C16.2@1655,903 ccw(c1679.14,903) 1662.07,885.93 ; C24.2@1720.79,833.71 ccw(c1703,825.34) 1703,845 ; C24.2@1720.79,856.29 cw(c1703,864.66) 1703,845 ; U9.3@1734.29,1065 1785,1065 1795,1055 1795,957 C25.1@1783,945 1783,883.24 ; C24.2@1748.88,864.91 ccw(c1754.55,886.92) C24.2@1770.61,870.85 ; C24.2@1751.37,874.6 ccw(c1759.62,906.61) 1783,883.23 ; C24.2@1771.17,851.07 cw(c1811.87,854.37) 1783,883.23 ; C25.1@1777.7,937.2 cw(c1764.89,924.39) 1783,924.39 cw(c1801.11,924.39) C25.1@1788.3,937.2 ; C25.1@1777.7,952.8 ccw(c1735.92,994.58) 1795,994.58 ; C25.1@1784.77,945.73 ccw(c1760.06,970.43) 1795,970.43 ; C12.1@2177.5,395.5 cw(c2177.5,367.1) 2197.58,387.18 ; C12.1@2181.76,403 C11.2@2255,329.76 ; 2203.05,381.72 cw(c2151.1,329.76) C11.2@2224.57,329.76 ; 2212.55,372.21 ccw(c2251.06,410.72) C11.2@2251.06,356.26 ; 2220.12,364.65 cw(c2185.24,329.76) C11.2@2234.57,329.76 ; C11.2@2229.62,355.14 ccw(c2251.06,376.58) C11.2@2251.06,346.26 ; 1703,845 C24.2@1744.76,845 1783,883.24
  Top Layer w30: C9.2@2145,3919.76 2223.24,3919.76 B2.2@2233,3910 ; C9.2@2160.6,3908.1 cw(c2188.76,3879.94) 2188.76,3919.76 cw(c2188.76,3959.59) C9.2@2160.6,3931.43 ; B2.2@2221.5,3919.76 cw(c2221.5,3901) B2.2@2234.77,3914.27
  other v1: 615,270 1070,270 1296,270 1522,270 1994,270 2200,270 1795,380 715,435 1875,470 1795,495 320,535 1290,535 715,540 1065,540 1820,625 2205,740 1735,915 1905,915 720,925 2205,936.15 325,940 1905,965 1735,970 720,980 320,1095 2205,1132.31 1530,1160 1410,1295 2205,1328.46 1535,1400 320,1430 2205,1524.62 325,1595 2205,1720.77 320,1925 735,2030 735,2080 325,2095 2205,2113.08 2205,2309.23 325,2435 2205,2505.38 320,2600 2205,2701.54 2205,2897.69 320,2930 810,2995 1410,3005 1610,3005 2205,3093.85 320,3095 1405,3220 1625,3220 2205,3290 1405,3395 315,3425 320,3605 320,3915 1095,3990 985,4070 315,4100 1095,4150 345,4230 641.67,4230 938.33,4230 1235,4230 1531.67,4230 1828.33,4230 2125,4230
D3V3: C20.1 C22.2 C26.2 C27.2 C28.1 C29.2 R23.1 R25.2 U8.5 U10.1 U10.9 U10.24 U10.36 U10.48 | length 4186.2
  Top Layer w10: C27.2@2775,2058 2808,2058 2815,2065 2815,2100 2831.73,2116.73 U10.24@2883.58,2116.73 ; C27.2@2782.8,2052.7 cw(c2795.61,2039.89) 2795.61,2058 cw(c2795.61,2076.11) C27.2@2782.8,2063.3 ; 2872,2607 R23.1@2920,2607 ; U10.24@2883.77,2116.92 2936.92,2116.92 3038.96,2218.96 ; C26.2@2907.7,2669.7 ccw(c2894.89,2656.89) 2894.89,2675 ccw(c2894.89,2693.11) C26.2@2907.7,2680.3 ; R23.1@2912.2,2601.7 ccw(c2899.39,2588.89) 2899.39,2607 ccw(c2899.39,2625.11) R23.1@2912.2,2612.3 ; C26.2@2913,2675 2875,2675 2870,2670 2870,2490 2875,2485 2955,2485 2995.79,2444.21 U10.9@2995.79,2386.42 2995.79,2262.13 3038.96,2218.96 ; 3147.74,2110.18 cw(c3136.57,2099.02) U10.36@3152.36,2099.02 ; U10.1@3153.27,2386.42 3153.27,2333.27 ; 3224.93,1977.07 ccw(c3242,1994.14) C28.1@3242,1970 ; C28.1@3230.96,1971.04 cw(c3222.43,1962.5) C28.1@3234.5,1962.5 ; C28.1@3242,1960 3197,2005 3165,2005 3153.27,2016.73 U10.36@3153.27,2063.58 3153.27,2104.65 3038.96,2218.96 ; 3300.43,2342.43 cw(c3317.5,2325.36) C29.2@3317.5,2349.5 ; C29.2@3306.46,2348.46 ccw(c3297.93,2357) C29.2@3310,2357 ; C29.2@3315,2357 3291.27,2333.27 U10.48@3206.42,2333.27 3153.27,2333.27 ; 3038.96,2218.96 3153.27,2333.27
  Top Layer w20: C20.1@3264.8,3494.8 cw(c3228.1,3458.1) 3280,3458.1 cw(c3331.9,3458.1) C20.1@3295.2,3494.8 ; v1(3280,2435) 3280,2392 C29.2@3315,2357 ; v1(3280,2855) R25.2@3908,2855 ; v1(3280,3210) C20.1@3280,3510 ; C20.1@3282.6,3497.6 3410,3497.6 U8.5@3528.63,3497.6 ; C20.1@3284.99,3511.06 ccw(c3317.49,3543.55) 3317.49,3497.6 ; C20.1@3299.14,3525.2 ccw(c3365.77,3591.84) 3365.77,3497.6 ; 3388.42,3497.6 ccw(c3388.42,3522.08) C22.2@3405.73,3504.77 ; C22.2@3414.27,3504.77 ccw(c3431.58,3522.08) 3431.58,3497.6
  Bottom Layer w20: v1(3280,2435) v1(3280,3210)
D5V: B1.1 B3.2 C7.2 C8.1 C19.1 C21.2 C34.1 R4.2 R22.1 R29.2 U1.7 U8.1 U8.3 U12.1 | length 9059.9
  Top Layer w10: U1.7@4080,3885 4287,4092 R22.1@4988,4092 ; U1.7@4080,3899.53 ccw(c4080,3934.6) 4104.8,3909.8 ccw(c4129.6,3885) U1.7@4094.53,3885 ; U1.7@4080,3909.53 ccw(c4080,3968.74) 4121.87,3926.87 ccw(c4163.74,3885) U1.7@4104.53,3885 ; 4973.69,4092 ccw(c4973.69,4111.81) R22.1@4987.7,4097.8 ; 4976.1,4092 cw(c4976.1,4075.6) R22.1@4987.7,4087.2
  Top Layer w20: R4.2@2840,882 2840,1063 3085,1308 3825,1308 B3.2@3830,1313 v1@3898,1313 ; U8.1@3611.37,3497.6 3675,3497.6 ; U8.3@3611.37,3572.4 3657.6,3572.4 3675,3555 3675,3497.6 ; 3708.42,3497.6 ccw(c3708.42,3522.08) C21.2@3725.73,3504.77 ; C21.2@3730,3497.6 3675,3497.6 ; 3809.39,1308 ccw(c3809.39,1331.11) B3.2@3825.73,1314.77 ; C34.1@3995,3173 U12.1@4094.64,3173 ; C8.1@4044.8,3600.86 cw(c3953.55,3509.61) 4082.6,3509.61 ; C8.1@4044.8,3639.14 ccw(c3953.55,3730.39) C7.2@4082.6,3730.39 ; U12.1@4054.53,3173 cw(c4054.53,3158.39) U12.1@4064.86,3168.72 ; C8.1@4058.94,3615.01 cw(c4001.83,3557.89) 4082.6,3557.89 ; C8.1@4058.94,3624.99 ccw(c4001.83,3682.11) 4082.6,3682.11 ; C7.2@4075.75,3729.29 cw(c4059.22,3712.76) 4082.6,3712.76 cw(c4105.98,3712.76) C7.2@4089.45,3729.29 ; 4082.6,3210.68 ccw(c4138.32,3210.68) U12.1@4098.92,3171.28 ; C7.2@4082.6,3745 4082.6,3185.04 U12.1@4094.64,3173 ; U12.1@4097.64,3170 U12.1@4094.64,3173
  Top Layer w30: R29.2@2297,4110 B1.1@2297,4030 3850,4030 3900,3980 3900,3745 ; C21.2@3730,3497.6 3827.6,3497.6 C19.1@3840,3510 ; 3766.3,3497.6 ccw(c3766.3,3579.77) C19.1@3824.4,3521.66 ; C19.1@3828.34,3498.34 cw(c3800.18,3470.18) 3840,3470.18 cw(c3879.82,3470.18) C19.1@3851.66,3498.34 ; v1(3840,3380) C19.1@3840,3510 ; C19.1@3843.94,3526.5 ccw(c3843.94,3556.82) C19.1@3865.38,3535.38 ; C19.1@3860.43,3510 cw(c3909.76,3510) 3874.88,3544.88 ; U1.7@4069.73,3874.73 cw(c4044.93,3849.93) 4080,3849.93 cw(c4115.07,3849.93) U1.7@4090.27,3874.73 ; C7.2@4080,3747.6 U1.7@4080,3885 ; C7.2@4082.6,3745 3900,3745 ; C19.1@3840,3510 3900,3570 3900,3745
  Bottom Layer w30: v1(3840,3380) 3790,3330 3790,2300 3925,2165 3925,1340 v1(3900,1315)
D24V: C5.1 C6.1 P1.5 P2.1 U1.1 | length 3573.2
  Top Layer w20: U1.1@4687.4,3877.6 4880,3877.6 5202.6,3877.6 5240,3915 5935,3915 5950,3930 5950,4046.85 5918.43,4078.43 P1.5@5858.27,4138.58 ; U1.1@4693.81,3871.19 cw(c4709.27,3855.73) U1.1@4709.27,3877.6 ; U1.1@4693.81,3898.81 ccw(c4745.01,3950.01) 4745.01,3877.6 ; 4915.69,3877.6 ccw(c4915.69,3918.05) C6.1@4944.29,3889.45 ; C6.1@4975.71,3889.45 ccw(c5004.31,3918.05) 5004.31,3877.6 ; 5020.69,3877.6 ccw(c5020.69,3918.05) C5.1@5049.29,3889.45 ; C5.1@5080.71,3889.45 ccw(c5109.31,3918.05) 5109.31,3877.6 ; P1.5@5858.27,4108.58 cw(c5858.27,4036.16) 5909.48,4087.37 cw(c5960.69,4138.58) P1.5@5888.27,4138.58
  Bottom Layer w20: P2.1@5858.27,2735.43 5975,2852.17 5975,4021.85 P1.5@5858.27,4138.58 ; P2.1@5858.27,2765.43 ccw(c5858.27,2837.86) 5909.48,2786.65 ccw(c5960.69,2735.43) P2.1@5888.27,2735.43 ; P1.5@5858.27,4108.58 cw(c5858.27,4036.16) 5909.48,4087.37 cw(c5960.69,4138.58) P1.5@5888.27,4138.58
GND: B2.1 C2.2 C7.1 C8.2 C19.2 C20.2 C21.1 C22.1 C23.2 C26.1 C27.1 C28.2 C29.1 C30.2 C31.2 C32.2 LED1.K LED2.K P11.9 P11.10 Q1.2 Q3.2 R2.2 U1.6 U8.2 U10.8 U10.23 U10.35 U10.44 U10.47 U12.4 | length 2958.4
  Top Layer w10: C27.1@2775,2122 2789.42,2136.42 ; C27.1@2775.73,2123.77 cw(c2806.27,2093.23) 2806.27,2136.42 ; C27.1@2777.5,2129.5 ccw(c2777.5,2141.57) C27.1@2786.04,2133.04 ; C27.1@2782.8,2116.7 cw(c2830.41,2069.09) 2830.41,2136.42 ; C27.1@2784.93,2123.03 cw(c2800.62,2125.22) 2789.42,2136.42 ; U10.23@2883.58,2136.42 2789.42,2136.42 ; v1@2990,2484 cw(c2990,2469.51) 3000.24,2479.76 cw(c3010.49,2490) v1@2996,2490 ; v1(2990,2490) 3015.47,2464.53 U10.8@3015.47,2386.42 ; U10.35@3133.58,2063.58 3133.58,2004.42 C28.2@3178,1960 ; 3143.16,1994.84 cw(c3129.01,1980.7) v1@3149,1979.83 ; v1@3145,1974 cw(c3145,1928.13) C28.2@3177.44,1960.56 ; v1@3145,1984 cw(c3145,1962.27) 3160.36,1977.64 ; 3160.93,1977.07 ccw(c3178,1994.14) C28.2@3178,1970 ; C28.2@3166.96,1971.04 cw(c3158.43,1962.5) C28.2@3170.5,1962.5 ; U10.47@3206.42,2313.58 3294.42,2313.58 C29.1@3315,2293 ; 3300.43,2307.57 ccw(c3317.5,2324.64) C29.1@3317.5,2300.5 ; C29.1@3306.46,2301.54 cw(c3297.93,2293) C29.1@3310,2293 ; U1.6@4180,3885 4317.51,4022.51 LED2.K@5180,4022.51 ; U1.6@4180,3899.53 ccw(c4180,3934.6) 4204.8,3909.8 ccw(c4229.6,3885) U1.6@4194.53,3885 ; U1.6@4180,3909.53 ccw(c4180,3968.74) 4221.87,3926.87 ccw(c4263.74,3885) U1.6@4204.53,3885 ; LED2.K@5160.35,4010.74 ccw(c5131.92,3982.31) 5131.92,4022.51 ccw(c5131.92,4062.72) LED2.K@5160.35,4034.29
  Top Layer w20: Q3.2@2111.26,3787.4 2297.6,3787.4 2325,3814.8 2325,3910 ; B2.1@2297,3910 2325,3910 ; 2640,3910 2325,3910
  Top Layer w30: C7.1@4154.09,3757.17 ccw(c4091.53,3819.73) 4180,3819.73 ; C7.1@4157.4,3745 4180,3767.6 ; C7.1@4157.5,3758.54 ccw(c4158.12,3789.47) 4180,3767.6 ; U1.6@4169.73,3874.73 cw(c4144.93,3849.93) 4180,3849.93 cw(c4215.07,3849.93) U1.6@4190.27,3874.73 ; U1.6@4180,3885 4180,3767.6
  other v1: 2645,280 2833.75,280 3022.5,280 3211.25,280 3400,280 3588.75,280 3777.5,280 3966.25,280 4155,280 4155,449.62 4155,619.23 4155,788.85 4155,958.46 4155,1128.08 4155,1297.69 4155,1467.31 4155,1636.92 4155,1806.54 4155,1976.15 3145,1980 4155,2145.77 3040,2150 2960,2225 3120,2225 3045,2290 4155,2315.38 4155,2485 2650,4205 2904.17,4205 3158.33,4205 3412.5,4205 3666.67,4205 3920.83,4205 4175,4205
GROUND: C1.1 C2.1 R1.1 R2.1 T1.1 | length 688.3
  Top Layer w20: R1.1@2310,3415 C2.1@2490,3415 ; R1.1@2320.33,3404.67 cw(c2345.26,3379.74) 2345.26,3415 cw(c2345.26,3450.26) R1.1@2320.33,3425.33 ; C1.1@2370,3575 R2.1@2540,3575 ; C1.1@2386.21,3548.79 cw(c2449.5,3485.5) 2449.5,3575 ; C1.1@2386.21,3591.21 ccw(c2425.36,3630.36) 2425.36,3575 ; 2410.5,3415 cw(c2410.5,3325.5) C2.1@2473.79,3388.79 ; 2434.64,3415 ccw(c2434.64,3470.36) C2.1@2473.79,3431.21 ; R2.1@2529.67,3564.67 ccw(c2504.74,3539.74) 2504.74,3575 ccw(c2504.74,3610.26) R2.1@2529.67,3585.33
  other v1: 6065,180 6067.36,4355
MUX0: U3.11 U5.11 U7.11 U10.18 | length 4888.4
  Top Layer w10: U5.11@1072.73,1005 1236.92,1005 2466.76,2234.84 U10.18@2883.58,2234.84 ; U5.11@1114.04,1000.18 cw(c1125.67,988.56) 1125.67,1005 cw(c1125.67,1021.44) U5.11@1114.04,1009.82
  Top Layer w20: v2(1005,1005) U5.11@1072.73,1005 ; v2(1005,2105) U7.11@1072.73,2105 ; v2(1005,3145) U3.11@1072.73,3145 ; v2@1010.3,999.7 cw(c1023.11,986.89) 1023.11,1005 cw(c1023.11,1023.11) v2@1010.3,1010.3 ; v2@1010.3,2099.7 cw(c1023.11,2086.89) 1023.11,2105 cw(c1023.11,2123.11) v2@1010.3,2110.3 ; v2@1010.3,3139.7 cw(c1023.11,3126.89) 1023.11,3145 cw(c1023.11,3163.11) v2@1010.3,3150.3
  Bottom Layer w20: v2@999.7,1010.3 ccw(c986.89,1023.11) 1005,1023.11 ccw(c1023.11,1023.11) v2@1010.3,1010.3 ; v2@999.7,2099.7 cw(c986.89,2086.89) 1005,2086.89 cw(c1023.11,2086.89) v2@1010.3,2099.7 ; v2@999.7,2110.3 ccw(c986.89,2123.11) 1005,2123.11 ccw(c1023.11,2123.11) v2@1010.3,2110.3 ; v2@999.7,3139.7 cw(c986.89,3126.89) 1005,3126.89 cw(c1023.11,3126.89) v2@1010.3,3139.7 ; v2(1005,1005) v2(1005,2105) v2(1005,3145)
MUX1: U3.10 U5.10 U7.10 U10.19 | length 5012.2
  Top Layer w10: U5.10@1072.73,955 1210.96,955 2471.12,2215.16 U10.19@2883.58,2215.16 ; U5.10@1114.04,950.18 cw(c1125.67,938.56) 1125.67,955 cw(c1125.67,971.44) U5.10@1114.04,959.82
  Top Layer w20: v2(965,3095) U3.10@1072.73,3095 ; v2(970,955) U5.10@1072.73,955 ; v2(970,2055) U7.10@1072.73,2055 ; v2@970.3,3089.7 cw(c983.11,3076.89) 983.11,3095 cw(c983.11,3113.11) v2@970.3,3100.3 ; v2@975.3,949.7 cw(c988.11,936.89) 988.11,955 cw(c988.11,973.11) v2@975.3,960.3 ; v2@975.3,2049.7 cw(c988.11,2036.89) 988.11,2055 cw(c988.11,2073.11) v2@975.3,2060.3
  Bottom Layer w20: v2@959.7,3089.7 cw(c934.82,3064.82) 970,3064.82 ; v2@964.7,960.3 ccw(c951.89,973.11) 970,973.11 ccw(c988.11,973.11) v2@975.3,960.3 ; v2@964.7,2049.7 cw(c951.89,2036.89) 970,2036.89 cw(c988.11,2036.89) v2@975.3,2049.7 ; v2@964.7,2060.3 ccw(c951.89,2073.11) 970,2073.11 ccw(c988.11,2073.11) v2@975.3,2060.3 ; v2(965,3095) 970,3090 v2(970,2055) v2(970,955)
MUX2: U3.9 U5.9 U7.9 U10.20 | length 5134.8
  Top Layer w10: U5.9@1072.73,905 1185,905 2475.47,2195.47 U10.20@2883.58,2195.47 ; U5.9@1114.04,900.18 cw(c1125.67,888.56) 1125.67,905 cw(c1125.67,921.44) U5.9@1114.04,909.82
  Top Layer w20: v2(930,905) U5.9@1072.73,905 ; v2(930,2005) U7.9@1072.73,2005 ; v2(930,3040) 935,3045 U3.9@1072.73,3045 ; v2@935.3,899.7 cw(c948.11,886.89) 948.11,905 cw(c948.11,923.11) v2@935.3,910.3 ; v2@935.3,1999.7 cw(c948.11,1986.89) 948.11,2005 cw(c948.11,2023.11) v2@935.3,2010.3 ; v2@935.3,3034.7 cw(c960.18,3009.82) 960.18,3045
  Bottom Layer w20: v2@924.7,910.3 ccw(c911.89,923.11) 930,923.11 ccw(c948.11,923.11) v2@935.3,910.3 ; v2@924.7,1999.7 cw(c911.89,1986.89) 930,1986.89 cw(c948.11,1986.89) v2@935.3,1999.7 ; v2@924.7,2010.3 ccw(c911.89,2023.11) 930,2023.11 ccw(c948.11,2023.11) v2@935.3,2010.3 ; v2@924.7,3034.7 cw(c911.89,3021.89) 930,3021.89 cw(c948.11,3021.89) v2@935.3,3034.7 ; v2(930,905) v2(930,2005) v2(930,3040)
NetC18_1: C18.1 R19.2 U9.4 | length 276.6
  Top Layer w10: R19.2@1591.7,1057.8 ccw(c1578.89,1070.61) 1597,1070.61 ccw(c1615.11,1070.61) R19.2@1602.3,1057.8 ; C18.1@1591.7,1102.2 cw(c1578.89,1089.39) 1597,1089.39 cw(c1615.11,1089.39) C18.1@1602.3,1102.2 ; C18.1@1597,1105 1597,1055 1606.69,1045.32 U9.4@1734.29,1045.32 ; R19.2@1602.3,1042.2 cw(c1609.83,1034.67) 1609.83,1045.32 ; R19.2@1602.3,1052.8 ccw(c1620.38,1070.88) 1620.38,1045.32
NetC23_1: C23.1 U8.4 | length 73.6
  Top Layer w20: U8.4@3528.63,3572.4 3543,3586.77 C23.1@3543,3640